# Altium PCB vp40_base_board.PcbDoc (part 4 of 5)
Units mil, origin at the board's own origin, x right, y up, seen from the top; angles counter-clockwise.
Board outline 8267.72 x 4330.71 mil, 4 copper layers (Top Layer, Internal Plane 1, Internal Plane 2, Bottom Layer), stack 30.635 mil thick; 531 components, 391 nets, 1969 pads, 1352 vias.
Unrouted connection lines stored in the file: 302.
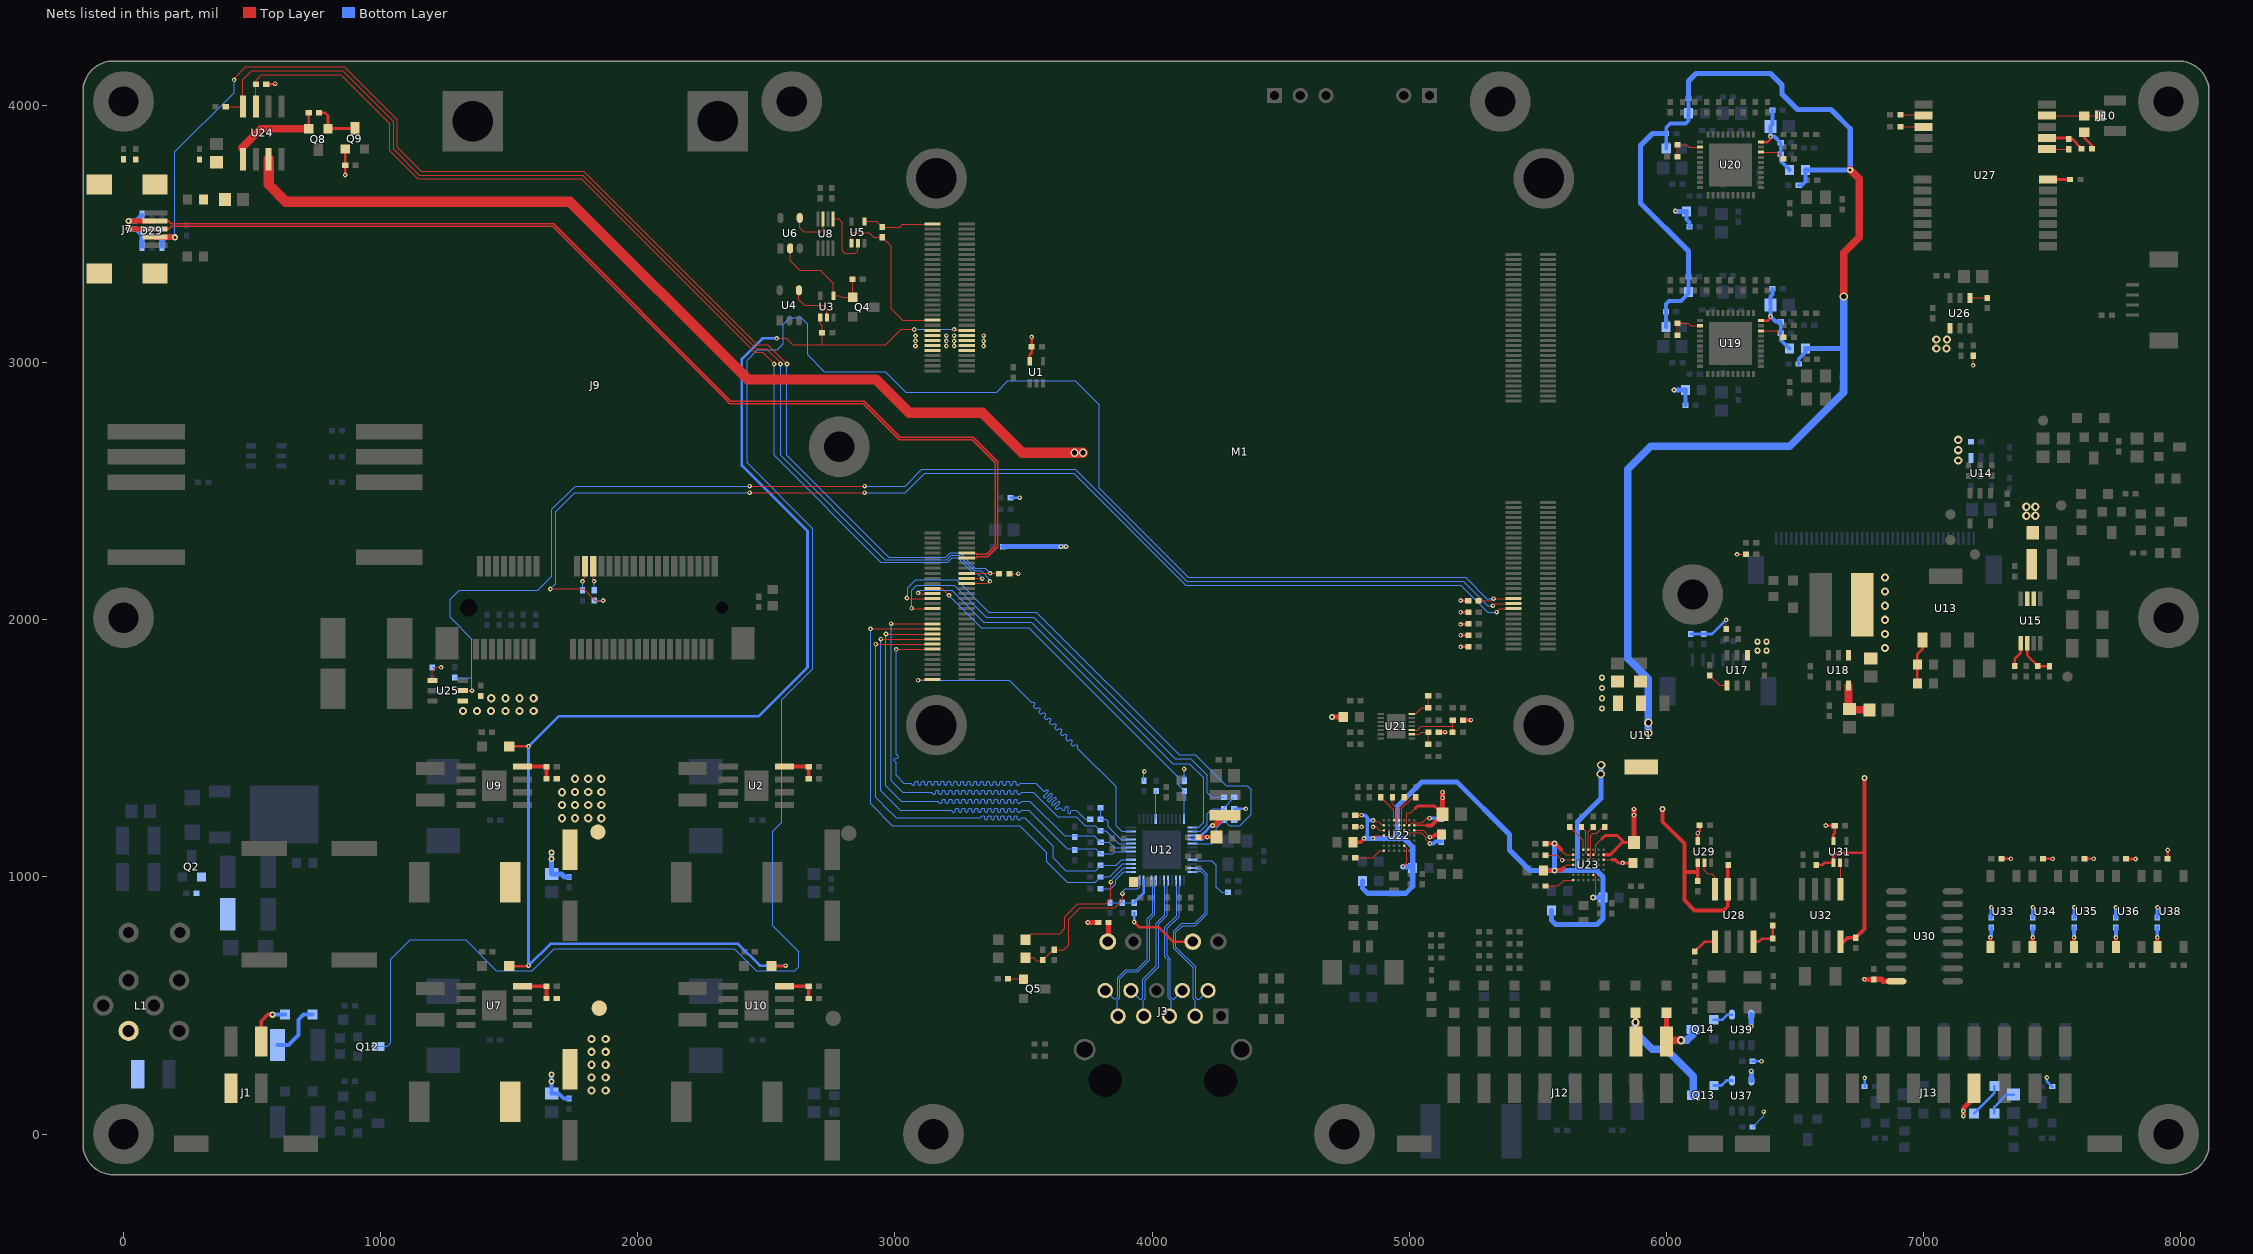
[diagram p6: the nets of this part, all layers, seen from the top]

## Via types
v1: diameter 18, hole 8, Top Layer to Bottom Layer, tented both sides, 481 vias
v2: diameter 18, hole 8, Top Layer to Bottom Layer, 376 vias
v3: diameter 32, hole 16, Top Layer to Bottom Layer, tented both sides, 202 vias
v4: diameter 24, hole 12, Top Layer to Bottom Layer, tented both sides, 182 vias
v5: diameter 24, hole 12, Top Layer to Bottom Layer, 65 vias
v6: diameter 32, hole 16, Top Layer to Bottom Layer, 34 vias
v7: diameter 32, hole 20, Top Layer to Bottom Layer, 7 vias
v8: diameter 32, hole 20, Top Layer to Bottom Layer, tented both sides, 3 vias
v9: diameter 35, hole 20, Top Layer to Bottom Layer, 2 vias

## Nets (pads, with @x,y where several pads share a name; then routed paths per layer and width w, separated by ;. In a path a pad name is that pad's centre, name@x,y a point inside that pad or via, vN(x,y) a via of type N, cw(c..) or ccw(c..) an arc to the next point about the centre after c; other vN are vias at no path point) (continued)
NetD37_1: D37.1 D39.2 J13.14 | length 264.6
  Top Layer w20: v2(7155,70) 7155,100 7196.85,141.85 J13.14@7196.85,178.35
  Bottom Layer w10: D39.2@7196.85,80.71 7275.59,159.45 D37.1@7275.59,187.01
  other v2: 7155,90
NetD37_2: D37.2 R157.2 | length 119.5
  Bottom Layer w10: D37.2@7275.59,80.71 7275.59,105.59 7323.54,153.54 R157.2@7350.39,153.54
NetD41_2: D41.2 R162.2 | length 219.9
  Bottom Layer w15: R162.2@598.43,346.46 641.46,346.46 680,385 680,445 699.57,464.57 D41.2@734.25,464.57
NetD44_2: D44.2 J12.13 Q13.1 | length 521.9
  Top Layer w20: D44.2@5880,471.85 5881.89,469.96 J12.13@5881.89,360.24
  Bottom Layer w30: v6(5880,435) 5880,395 5945,330 6000,330 6105.04,224.96 Q13.1@6105.04,150.98
NetD46_2: D46.2 J12.15 Q14.1 | length 245.5
  Top Layer w20: J12.15@6000,360.24 D46.2@6000,471.85
  Top Layer w30: J12.15@6000,360.24 6004.76,365 v6(6057.43,365)
  Bottom Layer w30: v6(6057.43,365) 6080,365 6104.16,389.16 Q14.1@6104.16,406.88
NetJ3_11: J3.11 R35.2 | length 75.4
  Top Layer w20: J3.11@3827.56,748.82 3830.9,752.16 R35.2@3830.9,822.83
NetJ3_13: J3.13 R33.2 | length 294.4
  Top Layer w10: v1(3930,825) 3950,805 4025,805 4081.18,748.82 J3.13@4157.87,748.82
  Bottom Layer w10: v1(3930,825) R33.2@3930,860
NetJ9_20: J9.20 R132.1 | length 87.1
  Top Layer w4.7: v2(1785,2150) 1785,2155.39 1795.28,2165.67 J9.20@1795.28,2208.66
  Bottom Layer w4.7: R132.1@1783.46,2126.43 1785,2127.96 v2(1785,2150)
NetJ9_22: J9.22 R133.1 | length 92.4
  Top Layer w4.7: J9.22@1826.77,2208.66 1826.77,2153.23 v2(1830,2150)
  Bottom Layer w4.7: v2(1830,2150) 1830,2153.58 1830.71,2154.29 R133.1@1830.71,2126.43
NetJ10_1: J10.1 L31.2 U27.11 | length 205.5
  Top Layer w4.7: U27.11@7480.43,3960.63 J10.1@7685.94,3960.63
NetL7_1: L7.1 U12.3 | length 158.6
  Top Layer w20: v1(4235,1200) 4243.31,1200 L7.1@4283.46,1240.16
  Bottom Layer w10: U12.3@4157.48,1161.42 4190.21,1161.42 4198.79,1170 4200,1170 4230,1200 v1(4235,1200)
NetL31_1: L31.1 R141.1 | length 77.4
  Top Layer w10: L31.1@7625,3896.27 7625,3875 7655.13,3844.87 R141.1@7655.13,3831.34
NetQ2_2: Q2.2 R1.1 R2.2
NetQ4_2: Q4.2 R15.1 U3.4 U6.2 | length 449.4
  Top Layer w4.7: U6.2@2592.52,3444.88 2592.52,3397.48 2630,3360 2710,3360 2760.65,3309.35 U3.4@2760.65,3260.39 2786.86,3260.39 2793.12,3254.13 Q4.2@2835.44,3254.13 2835,3254.57 R15.1@2835,3325
NetQ5_2: Q5.2 R43.2 | length 61.2
  Top Layer w4.7: R43.2@3439.87,605 3497.36,605 Q5.2@3500,602.36
NetQ8_1: Q8.1 Q9.1 R120.1 | length 196
  Top Layer w10: R120.1@760.28,3972.44 782.56,3972.44 795.28,3959.72 Q8.1@795.28,3909.45 796.54,3910.71 Q9.1@900.2,3910.71
NetQ13_2: Q13.2 U37.4 | length 79
  Bottom Layer w10: Q13.2@6185.04,188.98 6213.98,188.98 6233.66,208.66 U37.4@6255.91,208.66
NetQ14_2: Q14.2 U39.4 | length 79.5
  Bottom Layer w10: Q14.2@6184.16,444.88 6218.54,444.88 6238.23,464.57 U39.4@6255.46,464.57
NetR7_1: R7.1 R8.1 U2.4 | length 141.3
  Top Layer w15: U2.4@2570.87,1429.53 2664.33,1429.53 R7.1@2664.72,1429.13 R8.1@2664.72,1381.89
NetR12_1: R12.1 R13.1 U7.4 | length 141.3
  Top Layer w15: U7.4@1551.18,575.2 1644.65,575.2 R12.1@1645.04,574.8 R13.1@1645.04,527.56
NetR17_1: R17.1 R19.1 U9.4 | length 141.3
  Top Layer w15: U9.4@1551.18,1429.53 1644.65,1429.53 R17.1@1645.04,1429.13 R19.1@1645.04,1381.89
NetR18_1: R18.1 R20.1 U10.4 | length 141.3
  Top Layer w15: U10.4@2570.87,575.2 2664.33,575.2 R18.1@2664.72,574.8 R20.1@2664.72,527.56
NetR34_1: R34.1 U12.41 | length 108.9
  Bottom Layer w4.7: U12.41@4014.27,1225.89 4014.27,1332.73 R34.1@4015.75,1334.2
NetR38_1: R38.1 R40.2 U12.2 | length 243.8
  Bottom Layer w4.7: U12.2@4157.48,1177.17 4187.17,1177.17 4215,1205 4215,1245 4235,1265 R38.1@4279.87,1265 4279.87,1270 R40.2@4319.87,1310
NetR42_2: R42.2 U12.25 | length 154
  Bottom Layer w4.7: R42.2@3799.87,955 3840,955 3859.14,974.14 3859.14,989.14 3889.69,1019.69 U12.25@3918.3,1019.69
NetR45_2: R45.2 U12.9 | length 240
  Bottom Layer w4.7: U12.9@4157.48,1066.93 4160.76,1063.65 4231.35,1063.65 4250,1045 4250,960 4270,940 R45.2@4295.13,940
NetR61_2: R61.2 R65.1 U15.2 | length 151.6
  Top Layer w10: U15.2@7403.54,1909.45 7403.54,1861.58 R65.1@7445,1820.13 7489.75,1820.13 R61.2@7490,1819.87
NetR62_2: R62.2 R64.1 U13.1 | length 177.4
  Top Layer w10: R64.1@6976.38,1751.97 6976.38,1866.38 6996.06,1886.06 U13.1@6996.06,1921.26
NetR63_1: R63.1 U15.1 | length 98.8
  Top Layer w10: R63.1@7355,1820.13 7355,1848.98 7377.95,1871.93 U15.1@7377.95,1909.45
NetR70_2: R70.2 U17.1 | length 83
  Top Layer w4.7: R70.2@6169.29,1783.28 6207.57,1745 6235.13,1745 U17.1@6236.03,1744.09
NetR74_1: R74.1 R76.1 U18.6 | length 171.3
  Top Layer w30: U18.6@6708.66,1744.09 6708.66,1657.04 R76.1@6712.6,1653.1 6715.7,1650 R74.1@6790,1650
NetR79_1: R79.1 R80.1 U19.32 | length 139.9
  Top Layer w4.7: R80.1@6042.87,3106.3 R79.1@6042.87,3153.54 6085.16,3153.54 6095,3143.7 U19.32@6131.45,3143.7
NetR81_1: R81.1 U19.18 | length 98.7
  Top Layer w4.7: U19.18@6367.67,3124.02 6430.22,3124.02 R81.1@6455.81,3098.43
NetR88_1: R88.1 R89.1 U20.32 | length 139.9
  Top Layer w4.7: R89.1@6042.99,3800.91 R88.1@6042.99,3848.16 6079.84,3848.16 6089.69,3838.31 U20.32@6131.57,3838.31
NetR90_1: R90.1 U20.18 | length 98.7
  Top Layer w4.7: U20.18@6367.8,3818.63 6430.35,3818.63 R90.1@6455.94,3793.04
NetR95_2: R95.2 R101.1 U21.9 | length 115.6
  Top Layer w4.7: U21.9@5009.84,1555.12 5039.91,1555.12 5048.04,1563.24 5074.36,1563.24 R95.2@5074.61,1562.99 5074.61,1516 R101.1@5074.36,1515.75
NetR96_2: R96.2 R100.1 U21.10 | length 213.1
  Top Layer w4.7: U21.10@5009.84,1570.87 5030.87,1570.87 5046.62,1586.62 5169.1,1586.62 ; R100.1@5168.85,1562.99 5169.1,1563.24 5169.1,1586.62 ; R96.2@5169.1,1610.24 5169.1,1586.62
NetR97_1: R97.1 R99.1 U21.14 | length 121.5
  Top Layer w4.7: U21.14@5009.84,1633.86 5026.1,1633.86 5049.72,1657.48 R97.1@5074.36,1657.48 R99.1@5074.36,1704.72
NetR104_1: R104.1 U22.C3 | length 174
  Top Layer w3: U22.C3@4980.32,1181.11 4990.08,1171.35 5045,1171.35
  Top Layer w4.7: 5045,1171.35 5047.3,1171.35 5063.65,1155 5063.65,1146.35 v1(5080,1130)
  Bottom Layer w15: v1(5080,1130) 5095,1130 5102.35,1137.35 R104.1@5125,1137.35
NetR105_1: R105.1 U22.B2 | length 137.8
  Top Layer w3: U22.B2@5000,1200.79 5000.17,1200.79 5009.84,1210.46 5045,1210.46
  Top Layer w4.7: 5045,1210.46 5050.46,1210.46 5068.35,1228.35 v1(5078.74,1228.35)
  Bottom Layer w15: v1(5078.74,1228.35) 5101.53,1228.35 5105,1224.87 R105.1@5125,1224.87
NetR106_1: R106.1 U22.E1 | length 110.5
  Top Layer w4.7: R106.1@4890,1309.87 4940.74,1259.13 4940.74,1230.4 4940.94,1230.2 U22.E1@4940.94,1220.48
NetR107_1: R107.1 U22.D3 | length 161.8
  Top Layer w3: U22.D3@4960.63,1181.11 4961.11,1181.11 4970.13,1190.13 4970.13,1240
  Top Layer w4.7: 4970.13,1240 4970.13,1264.91 4970,1265.04 5014.83,1309.87 R107.1@5025,1309.87
NetR108_1: R108.1 U22.D1 | length 98
  Top Layer w4.7: U22.D1@4960.63,1220.48 4960.3,1220.81 4960.3,1269.06 4980.32,1289.09 4980.32,1309.55 R108.1@4980,1309.87
NetR109_1: R109.1 U22.D2 | length 119.7
  Top Layer w3: 4950.44,1240 4950.44,1210.98 U22.D2@4960.63,1200.79
  Top Layer w4.7: R109.1@4935,1309.87 4935,1285 4950.44,1269.56 4950.44,1240
NetR110_1: R110.1 U22.G7 | length 122.8
  Top Layer w4.7: R110.1@4790.13,1075 4858.2,1075 4885.55,1102.36 U22.G7@4901.57,1102.36
NetR115_1: R115.1 U23.E1 | length 110.3
  Top Layer w4.7: R115.1@5625,1194.87 5677.36,1142.52 5677.36,1106.5 U23.E1@5677.16,1106.3
NetR116_1: R116.1 U23.D3 | length 165
  Top Layer w3: U23.D3@5696.85,1066.93 5706.35,1076.43 5706.35,1125
  Top Layer w4.7: 5706.35,1125 5706.35,1159.81 5716.54,1170 5730,1170 5754.87,1194.87 R116.1@5760,1194.87
NetR117_1: R117.1 U23.D1 | length 96.1
  Top Layer w4.7: U23.D1@5696.85,1106.3 5696.85,1176.72 R117.1@5715,1194.87
NetR118_1: R118.1 U23.D2 | length 119.4
  Top Layer w3: 5687.35,1125 5687.35,1096.11 U23.D2@5696.85,1086.61
  Top Layer w4.7: R118.1@5670,1194.87 5687.35,1177.53 5687.35,1125
NetR119_1: R119.1 U23.G7 | length 117.3
  Top Layer w4.7: R119.1@5530.13,965 5580,965 5603.18,988.18 U23.G7@5637.79,988.18
NetR127_2: R127.2 U25.1 | length 111.3
  Top Layer w4.7: U25.1@1201.03,1763.78 1201.03,1801.03 1215,1815 v2(1235,1815)
  Bottom Layer w4.7: R127.2@1200.79,1815.15 1234.85,1815.15 v2(1235,1815)
NetR135_2: R135.2 U26.1 | length 67
  Top Layer w4.7: U26.1@7181.22,3251.97 7247.96,3251.97 R135.2@7248.15,3252.16
NetR137_1: R137.1 U27.14 | length 91.7
  Top Layer w4.7: R137.1@6910.01,3964.57 6996.18,3964.57 U27.14@7000.12,3960.63
NetR138_1: R138.1 U27.15 | length 90.1
  Top Layer w4.7: R138.1@6910.01,3917.32 U27.15@7000.12,3917.32
NetR139_1: R139.1 R141.2 U27.9 | length 153.7
  Top Layer w10: U27.9@7480.43,3874.02 7561.06,3874.02 7565,3870.08 7578.69,3870.08 7615.13,3833.65 R141.2@7615.13,3831.34
NetR139_2: R139.2 U27.8 | length 90.6
  Top Layer w4.7: U27.8@7480.43,3830.71 7570.17,3830.71 R139.2@7570.8,3830.08
NetR140_2: R140.2 U27.7 | length 86.4
  Top Layer w10: U27.7@7484.37,3712.6 R140.2@7570.8,3712.6
NetR143_2: R143.2 U28.5 | length 94.6
  Top Layer w10: R143.2@6110,709.87 6148.16,748.03 U28.5@6188.78,748.03
NetR145_2: R145.2 R146.1 U28.8 | length 130.2
  Top Layer w10: U28.8@6338.78,748.03 6359.25,748.03 6371.5,760.28 R146.1@6413.39,760.28 R145.2@6413.39,810.83
NetR151_2: R151.2 U33.1 | length 77.2
  Top Layer w15: v2(7260,765) 7260,729.37 U33.1@7261.02,728.35
  Bottom Layer w15: v2(7260,765) 7261.02,765 7263.78,767.76 R151.2@7263.78,802.96
NetR156_2: R156.2 U34.1 | length 75.3
  Top Layer w15: U34.1@7423.43,728.35 7423.43,763.23 v2(7425.2,765)
  Bottom Layer w15: v2(7425.2,765) R156.2@7425.2,802.96
NetR160_2: R160.2 U35.1 | length 74.9
  Top Layer w15: U35.1@7585.83,728.35 v2(7585.83,765)
  Bottom Layer w15: v2(7585.83,765) 7585.83,802.17 R160.2@7586.61,802.96
NetR165_2: R165.2 U36.1 | length 74.9
  Top Layer w15: v2(7747.84,765) 7748.23,764.61 U36.1@7748.23,728.35
  Bottom Layer w15: v2(7747.84,765) 7748.03,765.19 R165.2@7748.03,802.96
NetR168_2: R168.2 U38.1 | length 75.3
  Top Layer w15: v2(7909.26,765) 7910.63,763.63 U38.1@7910.63,728.35
  Bottom Layer w15: v2(7909.26,765) 7909.26,802.77 R168.2@7909.45,802.96
NetU3_2: U3.2 U4.4 | length 194.9
  Top Layer w4.7: U4.4@2626.78,3281.69 2626.78,3244.53 2648.67,3222.64 2723.31,3222.64 2735.05,3210.9 U3.2@2735.05,3175.39
NetU5_2: U5.2 U8.5 | length 249.4
  Top Layer w4.7: U8.5@2759.84,3559.06 2780.94,3559.06 2795,3545 2795,3435 2805,3425 2845,3425 2856.31,3436.31 U5.2@2856.31,3464.57
NetU6_4: U6.4 U8.7 | length 178.1
  Top Layer w4.7: U6.4@2629.92,3562.99 2629.92,3525.08 2645,3510 2710.79,3510 2720.47,3519.69 U8.7@2720.47,3559.06
NetU28_4: U28.4 U29.2 | length 127.8
  Top Layer w4.7: U29.2@6147.65,1055.12 6147.65,1026.07 6161.47,1012.25 6175.84,1012.25 6188.78,999.31 U28.4@6188.78,952.76
NetU31_2: U31.2 U32.1 | length 103.3
  Top Layer w4.7: U31.2@6675.2,1055.12 6677.36,1052.96 U32.1@6677.36,952.76
OTG-ID: D29.1 J7.4 M1.C43 R122.2 | length 5052.3
  Top Layer w4.7: v2(430,4100) 430,4105 475.97,4150.97 859.03,4150.97 1065,3945 1065,3837.09 1157.09,3745 1790.24,3745 2465.24,3070 2505,3070 v2(2580,2995) ; M1.C43@3279.53,2181.1 v2(3370,2181.1) 3404.02,2181.1 R122.2@3405.13,2180
  Top Layer w20: J7.4@122.05,3488.19 199.56,3488.19 v5(200,3487.75)
  Bottom Layer w4.7: v5(200,3487.75) 200,3820 430,4050 v2(430,4100) ; v2(2580,2995) 2580,2640 2976.35,2243.65 3198.09,2243.65 3215.19,2260.75 3252.52,2260.75 3313.27,2200 3351.1,2200 v2(3370,2181.1)
  Bottom Layer w20: D29.1@150,3455 150,3475 162.75,3487.75 v5(200,3487.75)
OTG-OC: M1.C41 R124.1 U24.3 | length 4093.2
  Top Layer w4.7: U24.3@514.37,3996.25 514.37,4081.74 R124.1@515.31,4082.68 515.31,4099.21 536.09,4120 845,4120 1035,3930 1035,3825 1145,3715 1780,3715 2455,3040 2485,3040 v2(2530,2995) ; M1.C41@3279.53,2161.42 3338.58,2161.42 v2(3340,2160)
  Bottom Layer w4.7: v2(2530,2995) 2530,2640 2945.75,2224.25 3206.13,2224.25 3223.23,2241.35 3244.49,2241.35 3305.24,2180.6 3319.4,2180.6 v2(3340,2160)
OTG-PWREN: M1.C39 R125.2 U24.4 | length 4297.4
  Top Layer w4.7: R125.2@397.83,3996.06 464.18,3996.06 U24.4@464.37,3996.25 464.37,4101.19 498.18,4135 852.64,4135 1050,3937.64 1050,3830 1150,3730 1785,3730 2460,3055 2500,3055 2555,3000 v2(2555,2995) ; M1.C39@3279.53,2141.73 3361.08,2141.73 v2(3369.35,2150)
  Bottom Layer w4.7: v2(2555,2995) 2555,2640 2961.05,2233.95 3202.11,2233.95 3219.21,2251.05 3248.5,2251.05 3309.25,2190.3 3334.7,2190.3 3369.35,2155.65 v2(3369.35,2150)
OTG-SH-GND: C172.2 J7.6 J7.7 J7.8 J7.9 R123.1
OTG_N: D29.4 J7.2 M1.C49 | length 4297.8
  Top Layer w5.3: J7.2@122.05,3551.18 173.91,3551.18 185.16,3539.93 1672.28,3539.93 2362.22,2850 2880,2850 3020,2710 3305,2710 3400,2615 3400,2283.88 3364.76,2248.64 3361.62,2245.5 3319.02,2245.5 3313.67,2240.16 M1.C49@3279.53,2240.16
  Top Layer w20: v5(20,3551.18) J7.2@122.05,3551.18
  Bottom Layer w20: v5(20,3551.18) 49.33,3551.18 D29.4@71.26,3573.11
OTG_P: D29.3 J7.3 M1.C51 | length 4311.6
  Top Layer w5.3: J7.3@122.05,3519.69 173.91,3519.69 185.16,3530.93 1668.56,3530.93 2334.49,2865 2358.49,2841 2876.27,2841 3016.27,2701 3301.27,2701 3391,2611.27 3391,2287.61 3357.89,2254.5 3319.02,2254.5 3313.67,2259.84 M1.C51@3279.53,2259.84
  Top Layer w20: v5(20,3520) 20.31,3519.69 J7.3@122.05,3519.69
  Bottom Layer w20: v5(20,3520) 50,3520 71.26,3498.74 D29.3@71.26,3455
OTGVBUS: C170.2 C173.1 C174.1 L29.1 Q8.2 R120.2 U24.5 | length 354.1
  Top Layer w10: Q8.2@720.28,3909.45 R120.2@720.28,3972.44
  Top Layer w30: 460,3835 534.45,3909.45 Q8.2@720.28,3909.45
P1V8: C30.1 C77.1 C84.1 C85.1 C114.1 C115.1 C116.1 C145.2 C147.2 C148.2 C162.2 C164.2 C165.2 L11.1 L12.1 L13.1 L15.1 L16.1 L17.1 L21.1 L27.1 U11.2 U11.4 U22.C6 U22.G2 U22.G4 U23.C6 U23.G2 U23.G4 | length 9157
  Top Layer w3: U22.C6@4980.32,1122.05 4990.08,1112.29 4990.08,1085 ; U23.C6@5716.54,1007.87 5726.04,998.37 5726.04,970
  Top Layer w4.7: v1(4860,1150) 4860,1157.48 4863.74,1161.22 4901.57,1161.22 U22.G4@4901.57,1161.42 ; v1(4860,1220) 4865,1215 4880.79,1215 4895,1200.79 U22.G2@4901.57,1200.79 ; v1(4975,1040) 4991.35,1056.35 4991.35,1071.77 4990.08,1073.04 4990.08,1085 ; 5590,1106.3 5609.69,1086.61 U23.G2@5637.79,1086.61 ; 5600,1035 5612.24,1047.24 U23.G4@5637.79,1047.24 ; v4(5715,920) 5726.35,931.35 5726.35,956.77 5726.04,957.09 5726.04,970
  Top Layer w15: C148.2@4781.5,1135 4810,1135 v1(4825,1150) ; C145.2@4789.87,1240 4814.84,1240 4815,1240.16 v1(4815,1240) ; C165.2@5521.5,1025 v4(5565,1025) 5590,1025 5600,1035 ; C162.2@5529.87,1130 v4@5565,1130 ; v4(5565,1129.92) 5566.38,1129.92 5590,1106.3
  Top Layer w30: v7(6690,3257.57) 6690,3427.4 6750,3487.4 6750,3715 v5(6715,3750)
  Bottom Layer w10: C147.2@5008.5,1040 C147.2@5013.5,1035
  Bottom Layer w15: v1(4815,1240) 4828.5,1240 4837,1231.5 4837,1220 ; v1(4825,1150) 4837,1162 4837,1220 ; v1(4860,1220) 4837,1220 ; L11.1@5998.87,3139.26 5998.43,3139.7 C77.1@5998.43,3198.31 5998.43,3228.43 6010,3240 6056.86,3240 6086.17,3269.31 L13.1@6086.17,3275.59 6085.73,3276.03 C85.1@6085.73,3334.65 ; L15.1@5999.69,3832.41 5999.69,3914.69 6015,3930 6074.98,3930 6085.86,3940.87 C115.1@6085.86,4029.26 ; C84.1@6515.13,2995 6515.13,3014.54 6541.5,3040.91 L12.1@6541.5,3055 ; C114.1@6515.13,3690 6526.92,3690 6541.5,3704.57 L16.1@6541.5,3750
  Bottom Layer w20: L21.1@4818.5,985 4818.5,956.52 4838,937.02 4986.52,937.02 5013.5,964 C147.2@5013.5,1035 5013.5,1116.5 4980,1150 4955,1150 ; v1(4825,1150) v1(4860,1150) 4955,1150 ; v1(4975,1040) C147.2@5008.5,1040 ; L27.1@5553.5,870 5553.5,831.5 5570,815 5730,815 5753.5,838.5 C164.2@5753.5,920 ; v4(5565,1129.92) v4(5565,1025) ; v4(5715,920) C164.2@5753.5,920 ; v7(5746.4,1435) 5746.4,1306.45 5655,1215.05 5655,1025 ; C116.1@5999.24,3891.46 5946.46,3891.46 5900,3845 5900,3620 6085.73,3434.27 C85.1@6085.73,3334.65 ; C115.1@6085.86,4029.26 6085.86,4095.86 6115,4125 6405.13,4125 6450,4080.13 6450,4045 6510,3985 6640,3985 6715,3910 v5(6715,3750) L16.1@6541.5,3750 ; L12.1@6541.5,3055 6690,3055 ; 4955,1150 4955,1275 5050,1370 5185,1370 5390,1165 5390,1105.12 5470.12,1025 v4(5565,1025) ; v4(5565,1025) 5655,1025 ; 5655,1025 5728.5,1025 5753.5,1000 C164.2@5753.5,920
  Bottom Layer w30: v7(5930,1560) v7(5930,1600) 5930,1770 5850,1850 5850,2585 5940,2675 6480,2675 6690,2885 6690,3055 v7(6690,3257.57)
  other v7: 5745,1400
P2V8-OUT: D8.1 D11.1 D12.1 M1.D17 R11.1 U3.1 | length 5703.7
  Top Layer w4.7: v2(2540,3095) 2577.52,3095 2602.52,3070 2718.78,3070 ; U3.1@2709.46,3175.39 2709.46,3151.3 2716.89,3143.87 R11.1@2716.89,3116.34 2716.89,3071.89 2718.78,3070 ; v1(3075,3129.32) 3024.32,3129.32 2965,3070 2718.78,3070 ; v1(3230,3130) 3230,3125.99 M1.D17@3279.53,3125.99
  Top Layer w10: D8.1@1500,653.54 1573.35,653.54 v2(1574.8,655) ; D11.1@1500,1507.87 v2(1574.8,1507.87) ; D12.1@2519.69,653.54 2573.54,653.54 v2(2575,655)
  Bottom Layer w4.7: v1(3075,3129.32) 3075.68,3130 v1(3230,3130)
  Bottom Layer w10: v2(1574.8,655) v2@1574.9,655.1 ; v2(2540,3095) 2485,3095 2405,3015 2405,2600 2660,2345 2660,1815 2470,1625 1691.93,1625 v2(1574.8,1507.87) 1574.8,655.2 v2@1574.9,655.1 ; v2(2575,655) 2475,655 2390,740 1659.8,740 v2@1574.9,655.1
P3V3: C24.2 C27.1 C28.2 C31.1 C40.1 C41.1 C63.1 C64.1 C75.1 C105.1 C141.2 C144.2 C156.2 C159.2 C191.1 C194.1 C200.1 L4.2 L6.1 L9.1 L14.1 L18.1 L19.1 M1.D9 M1.D10 M1.D11 M1.D12 M1.D13 M1.D14 M1.D15 M1.D16 pad.@1845,1175 Q9.2 R5.1 R19.2 R23.2 R24.2 R25.2 R26.2 R27.2 R28.2 R29.2 R35.1 R36.2 R37.2 R38.2 R39.2 R69.1 R72.1 R95.1 R96.1 R121.2 R122.1 R124.2 R126.1 R134.1 R149.1 R150.1 R151.1 R154.1 R155.1 R156.1 R159.1 R160.1 R161.1 R164.1 R165.1 R166.1 R167.1 R168.1 R169.1 U1.5 U11.3 U12.4 U14.1 U15.6 U15.7 U17.4 U22.A3 U22.G3 U23.A3 U23.G3 U25.4 U26.4 U29.5 U30.16 U31.5 U37.5 U39.5 | length 2900.3
  Top Layer w3.82: v1(6275,2255) R72.1@6309.87,2255
  Top Layer w4.7: R122.1@3445.13,2180 v1(3480,2180) ; C141.2@4789.87,1195 v1(4815,1195) ; v1(4860,1195) 4871.83,1195 4885.73,1181.11 U22.G3@4901.57,1181.11 ; U22.A3@5019.69,1181.11 5053.89,1181.11 v1(5080,1155) ; C156.2@5529.87,1085 5575,1085 5593.07,1066.93 U23.G3@5637.79,1066.93 ; U23.A3@5755.91,1066.93 5788.19,1066.93 ; R69.1@6232.28,1965.01 v2(6232.28,2000) ; v1(7193.03,2990) R134.1@7193.03,3027.12
  Top Layer w10: R124.2@555.31,4082.68 587.68,4082.68 v2(590,4085) ; v2(862.02,3730) 862.2,3730.19 Q9.2@862.2,3830.71 ; U1.5@3524.25,3005.43 3524.25,3031.57 3531.68,3039 R5.1@3531.68,3062.16 v2(3531.68,3100.63) ; C40.1@4238.7,1155 C40.1@4248.03,1145.67 ; v2(5200,1895) R23.2@5224.49,1895 ; v2(5200,1940) 5226.73,1940 R24.2@5231.65,1935.08 ; v2(5200,1982.32) R25.2@5231.65,1982.32 ; v2(5200,2029.57) R26.2@5231.65,2029.57 ; v2(5200,2075) R161.1@5229.87,2075 ; U29.5@6122.05,1140.12 v2(6122.05,1170) 6129.48,1177.43 C191.1@6129.48,1200.79 ; v2(6620,1200) C200.1@6654.87,1200 6654.87,1169.87 6649.61,1164.61 U31.5@6649.61,1140.12 ; R150.1@7303.59,1070.86 v2(7340,1070.87) ; R155.1@7465.01,1070.87 v2(7502.05,1070.87) ; R159.1@7626.43,1070.87 v2(7662,1070.87) ; R164.1@7787.84,1070.87 7788.71,1070 v2(7825,1070) ; R167.1@7949.26,1070.87 7950,1071.61 v2(7950,1105)
  Top Layer w12: 5788.19,1066.93 5801.35,1066.93 5813.17,1055.12 C159.2@5870.08,1055.12
  Top Layer w15: C41.1@4180.13,1155 C40.1@4238.7,1155 ; v1(5080,1155) 5091.69,1155 5102.05,1165.36 C144.2@5125.99,1165.36 ; R95.1@5114.61,1562.99 v1(5139.76,1562.99) ; R96.1@5209.1,1610.24 5209.34,1610 v1(5240,1610)
  Top Layer w20: v1(3750,822.83) R35.1@3790.9,822.83 ; v4(4700,1622.05) L19.1@4743.65,1622.05 ; v2(6770,601.92) C194.1@6807.09,601.92 6807.53,602.36 6835.62,602.36 6843.5,594.49 U30.16@6894.17,594.49
  Bottom Layer w4.7: R36.2@3968.5,1374.2 3968.5,1408.5 v1(3970,1410) ; v1(4125,1420) 4125.98,1419.02 R39.2@4125.98,1374.2 ; R166.1@6335.09,27.56 6378.13,70.6 v2(6378.13,87.13)
  Bottom Layer w10: R29.2@3449.87,2475 v2(3485,2475) ; U12.4@4157.48,1145.67 4195.67,1145.67 4205,1155 v1(4215,1155) ; R37.2@4319.87,1220 R38.2@4319.87,1265 v1(4365,1265) ; R28.2@6095,1944.87 R27.2@6145,1944.87 6177.16,1944.87 v2(6232.28,2000) ; R169.1@6335.09,283.46 v2(6370,283.46) ; R149.1@6771.21,185.04 v2(6771.21,218.79) ; v2(7480,220) 7480,205.48 R154.1@7500.44,185.04
  Bottom Layer w15: C75.1@6073.92,2834.65 6073.92,2893.26 L14.1@6074.36,2893.7 ; L18.1@6078.19,3588.2 6078.19,3556.81 6089.56,3545.44 C105.1@6089.56,3528.2 ; R151.1@7263.78,842.96 v2(7263.78,881.89) ; R156.1@7425.2,842.96 v2(7425.2,881.89) ; R160.1@7586.61,842.96 v2(7586.61,881.89) ; R165.1@7748.03,842.96 v2(7748.03,881.89) ; R168.1@7909.45,842.96 7909.45,881.34 v2(7910,881.89)
  Bottom Layer w20: v4(1665,1095) 1665,1012.17 C24.2@1665.35,1011.81 1703.19,1011.81 1714.81,1000.19 C28.2@1732.28,1000.19 ; v1(6030,2893.7) L14.1@6074.36,2893.7 ; v1(6035,3590) 6036.8,3588.2 L18.1@6078.19,3588.2 ; v2(6330.27,245) 6330.71,244.56 U37.5@6330.71,208.66 ; U39.5@6330.27,464.57 6330.27,420.44 v2(6330.71,420)
  other v1: 5830,1055.12 5595,1065 3080,3065 3200,3065 3230,3064.96 3345,3065 3080,3085 3200,3085 3230,3084.65 3345,3084.65 3080,3104.33 3200,3105 3230,3105 3345,3105
  other v3: 1704.72,1228.35 1755.91,1228.35 1807.09,1228.35 1858.27,1228.35 1704.72,1279.53 1755.91,1279.53 1807.09,1279.53 1858.27,1279.53 1704.72,1329.53 1755.91,1330.71 1807.09,1330.71 1858.27,1330.71 1755.91,1381.89 1807.09,1381.89 1858.27,1381.89 7400,2405 7435,2405 7400,2440 7435,2440 7135,2620 7135,2660 7135,2700 7050,3055 7090,3055 7050,3090 7091.11,3090
  other v4: 1665,1070 5750,1655 5750,1695 5750,1735 5750,1775
  other v5: 6355,1880 6390,1880 6355,1915 6390,1915
  other v6: 1320,1645 1375,1645 1428.94,1645 1485,1645 1540,1645 1595,1645 1430,1695 1485,1695 1540,1695 1595,1695
P5V0: C17.1 C18.2 C19.2 C71.1 C140.2 C155.2 C189.1 C190.1 C199.1 C201.2 L3.2 L10.1 pad.@1850,490 R13.2 R31.2 U18.1 U22.A2 U22.C2 U23.A2 U23.C2 U24.7 U28.3 U29.1 U31.1 U32.8 | length 6754.4
  Top Layer w3: U22.C2@4980.32,1200.79 4990,1210.46 4990,1240 ; U23.C2@5716.54,1086.61 U23.C2@5716.54,1086.61 5726.04,1096.04 5726.04,1125
  Top Layer w4.7: 4990,1240 4990,1245 4995,1250 5006.36,1250 5023.98,1267.62 ; 5726.04,1125 5749.35,1148.31
  Top Layer w5: U22.A2@5019.69,1200.79 5070,1200.79
  Top Layer w10: C199.1@6582.68,1046.8 6606.69,1046.8 6615,1055.12 U31.1@6649.61,1055.12 6649.61,1079.61 6665,1095 6770,1095
  Top Layer w12: 5023.98,1267.62 5032.29,1275.92 5098.11,1275.92 C140.2@5129.93,1244.1 ; 5749.35,1148.31 5762.45,1161.42 5808.58,1161.42 5836.14,1133.86 ; U23.A2@5755.91,1086.61 5781.58,1086.61 5828.83,1133.86 5836.14,1133.86 ; C155.2@5874.02,1133.86 5836.14,1133.86
  Top Layer w15: 5070,1200.79 5086.62,1200.79 C140.2@5129.93,1244.1 ; v5(5985,1263.78) 5985,1215 6070,1130 6070,1020 ; C190.1@6122.05,984.69 6122.05,1019.91 ; U29.1@6122.05,1055.12 6122.05,1019.91 ; C189.1@6240.16,1046.8 6238.78,1045.43 U28.3@6238.78,952.76 6238.78,886.24 6222.54,870 6110,870 6070,910 6070,1020 ; U32.8@6677.36,748.03 6689.8,748.03 6705.74,763.97 C201.2@6736.46,763.97 6770,797.51 6770,905 6770,1095 v5(6770,1385) ; 6070,1020 6070.09,1019.91 6122.05,1019.91
  Top Layer w20: C140.2@5129.93,1244.1 v2(5129.93,1329.53) ; C155.2@5874.02,1133.86 v2(5874.02,1263.78)
  Top Layer w40: U24.7@564.37,3791.53 564.37,3692.91 631.3,3625.98 1736.13,3625.98 2427.24,2934.88 2925.12,2934.88 3055,2805 3340,2805 3495,2650 v7(3697.96,2650) v7(3731.49,2650)
  Bottom Layer w15: v4(1665,232.28) 1665,157.83 C18.2@1665.35,157.48 1692.52,157.48 1712.02,137.98 C19.2@1732.28,137.98
  Bottom Layer w20: R31.2@3419.87,2285 v1(3665.28,2285)
  other v1: 3645,2285
  other v2: 5874.02,1240 5129.93,1308.23
  other v3: 1820,170 1875,170 1820,220 1875,220 1820,270 1875,270 1820,320 1875,320 1820,370 1875,370 6850,1890 6850,1945 6850,2000 6850,2055 6850,2110 6850,2165
  other v4: 1665,205
PCIE-PWR-EN: M1.A20 R128.2 U25.5 | length 5213.8
  Top Layer w4.7: U25.5@1319.14,1724.41 v2(1355,1724.41) ; v2(2435,2520) v2(2881.9,2520) ; v2(5325,2055) 5332.99,2062.99 M1.A20@5405.51,2062.99
  Bottom Layer w4.7: R128.2@1287.4,1775.4 1354.6,1775.4 1355,1775 ; v2(1355,1724.41) 1355,1775 ; v2(2435,2520) 1755.87,2520 1665.35,2429.49 1665.35,2170.35 1610,2115 1305,2115 1270,2080 1270,2010 1355,1925 1355,1775 ; v2(2881.9,2520) 3040,2520 3105,2585 3700.3,2585 4135.3,2150 5210,2150 5305,2055 v2(5325,2055)
PCIE-RST: M1.A18 R133.2 | length 4584.1
  Top Layer w4.7: v2(1660,2120) 1790,2120 1835,2075 v2(1865,2075) ; v2(2435,2495) v2(2881.9,2495) ; v2(5340,2030) 5340,2030.43 5352.87,2043.31 M1.A18@5405.51,2043.31
  Bottom Layer w4.7: v2(1660,2120) 1680,2140 1680,2420 1755,2495 v2(2435,2495) ; R133.2@1830,2075.13 1864.87,2075.13 v2(1865,2075) ; v2(2881.9,2495) 3040,2495 3115,2570 3695,2570 4130,2135 5200,2135 5305,2030 v2(5340,2030)
PHY-RX-CLK: R32.2 R54.2 U12.33 | length 208
  Bottom Layer w4.7: R54.2@3799.87,1270 R32.2@3799.87,1225 3820,1225 3830,1215 3830,1195 3879.33,1145.67 U12.33@3918.3,1145.67
PMIC-ON-REQ: M1.D22 R10.1 U5.1 | length 634.1
  Top Layer w4.7: U5.1@2830.71,3464.57 2830,3465.28 2830,3496.42 2838.58,3505 2901.06,3505 2918.31,3487.75 R10.1@2950.08,3487.75 2985,3452.83 2985,3210.36 3030,3165.36 M1.D22@3145.67,3165.36
PMIC-PWRON: M1.D60 R10.2 U5.4 | length 277.6
  Top Layer w4.7: U5.4@2881.9,3549.57 2928.26,3549.57 R10.2@2950.08,3527.75 3017.75,3527.75 3029.37,3539.37 M1.D60@3145.67,3539.37
POR-B: M1.D18
PVDD-1V8-VIDEO1: C80.1 C81.1 C95.2 C97.2 L12.2 U19.20 | length 326
  Top Layer w10: U19.20@6367.67,3163.39 6395.35,3163.39 6405,3173.04 v1(6405,3180)
  Bottom Layer w15: C80.1@6412.5,3287.4 6412.5,3265 6405.07,3257.57 C81.1@6405.07,3224.41 6405.07,3180.07 v1(6405,3180) 6425,3160 C97.2@6445.13,3160 C95.2@6445.13,3115 6445.13,3088.38 L12.2@6478.5,3055
PVDD-1V8-VIDEO2: C110.1 C111.1 C125.2 C127.2 L16.2 U20.20 | length 326.7
  Top Layer w10: U20.20@6367.8,3858 6393,3858 6405,3870 v1(6405,3880)
  Bottom Layer w15: C110.1@6412.63,3982.02 6412.63,3926.46 C111.1@6405.2,3919.02 6405.2,3880.2 v1(6405,3880) 6420.13,3880 C127.2@6445.13,3855 C125.2@6445.13,3810 6445.13,3784.87 6478.5,3751.5 L16.2@6478.5,3750
PWRIN: C1.1 J1.2 L1.1
REV-SIG: D41.1 J1.3 | length 181.9
  Top Layer w15: J1.3@535.43,360.24 535.43,439.09 560.91,464.57 v4(579.57,464.57)
  Bottom Layer w15: v4(579.57,464.57) D41.1@627.95,464.57
REV-STATUS: M1.A22 Q12.1 R161.2 | length 8600.6
  Top Layer w4.7: R161.2@5269.87,2075 5320,2075 v2(5327.68,2082.68) M1.A22@5405.51,2082.68
  Bottom Layer w4.7: Q12.1@989.45,341.15 1026.58,341.15 1040,354.57 1040,680 1115,755 1330,755 1449.8,635.2 1590.2,635.2 1675,720 2375,720 2460,635 2610,635 2625,650 2625,710 2523.86,811.14 2523.86,1177.2 2560,1213.35 2560,1690 2680,1810 2680,2355 2425,2610 2425,3010 2425.13,3010 2465.13,3050 2542.01,3050 2565,3072.99 2565,3150 2590,3175 2635,3175 2660,3150 2660,3030 2725,2965 2961.41,2965 3041.41,2885 3395,2885 3439.13,2929.13 3700.87,2929.13 3793.86,2836.14 3793.86,2511.14 4140,2165 5220,2165 5302.32,2082.68 v2(5327.68,2082.68)
RGMII-INT: M1.C34 R37.1 U12.5 | length 2239.1
  Top Layer w4.7: v1(3046.36,2085) 3048.69,2082.68 M1.C34@3145.67,2082.68
  Bottom Layer w4.7: v1(3046.36,2085) 3050,2085 3050,2125 3080,2155 3240,2155 3365,2030 3550,2030 4105,1475 4167.72,1475 4287.72,1355 4369.33,1355 4385,1339.33 4385,1244.41 4340.59,1200 4299.87,1200 R37.1@4279.87,1220 4250,1190.13 4250,1150 4229.92,1129.92 U12.5@4157.48,1129.92
RGMII-LED-10-100: D13.1 U12.26 | length 593.6
  Top Layer w4.7: D13.1@3507.87,755.91 3531.97,780 3640,780 3660,800 3660,845 3710,895 3820,895 3840,915 v1(3840,980)
  Bottom Layer w4.7: v1(3840,980) 3840,985 3890.43,1035.43 U12.26@3918.3,1035.43
RGMII-LED-1000: D14.1 R48.1 R56.2 U12.24 | length 671.1
  Top Layer w4.7: D14.1@3507.87,686.09 3538.91,686.09 3550,675 3572.83,675 R56.2@3574.8,676.98 3614.8,716.98 R48.1@3620,716.98 3656.98,716.98 3675,735 3675,835 3720,880 3855,880 3885,910 v1(3885,935)
  Bottom Layer w4.7: v1(3885,935) 3885,945 3895,955 3945,955 3951.28,961.28 U12.24@3951.28,986.71
RGMII-LED-ACT: R33.1 R49.1 R57.2 U12.23 | length 196
  Bottom Layer w4.7: R49.1@3836.3,900 3836.55,899.75 R57.2@3883.54,899.75 3929.75,899.75 R33.1@3930,900
  Bottom Layer w10: R33.1@3930,900 3967.02,937.02 U12.23@3967.02,986.71
RGMII-MDC: M1.C36 U12.1 | length 1696.7
  Top Layer w4.7: v1(3090,2105) 3092.64,2102.36 M1.C36@3145.67,2102.36
  Bottom Layer w4.7: v1(3090,2105) 3100,2115 3220,2115 3345,1990 3530,1990 4080,1440 4145,1440 4200,1385 4200,1212.07 4180.84,1192.91 U12.1@4157.48,1192.91
RGMII-MDIO: M1.C38 R39.1 U12.48 | length 1433
  Top Layer w4.7: M1.C38@3145.67,2122.05 3182.95,2122.05 v1(3210,2095)
  Bottom Layer w4.7: v1(3210,2095) 3335,1970 3520,1970 4100,1390 4100,1360.19 R39.1@4125.98,1334.2 4124.5,1332.72 U12.48@4124.5,1225.89
RGMII-NRST: M1.C30 R40.1 | length 1756.5
  Top Layer w4.7: v1(3065,2045) 3066.69,2043.31 M1.C30@3145.67,2043.31
  Bottom Layer w4.7: v1(3065,2045) 3065,2115 3085,2135 3230,2135 3355,2010 3540,2010 4090,1460 4150.67,1460 4215,1395.67 4215,1327.02 4232.02,1310 R40.1@4279.87,1310
RGMII-RXCLK: M1.C14 R32.1 | length 2106
  Top Layer w4.7: v1(3005,1885) 3144.84,1885 M1.C14@3145.67,1885.83
  Bottom Layer w4.7: v1(3005,1885) 3005,1480 3005,1477.46 3008.81,1473.65 3009.19,1473.65 3013,1469.84 3013,1464.76 3009.19,1460.95 3005,1460.95 3000.81,1460.95 2997,1457.14 2997,1452.06 3000.81,1448.25 3001.19,1448.25 3005,1444.44 3005,1440 3005,1395 3035,1365 3055,1365 3060.74,1365 3064.55,1361.19 3064.55,1360.81 3068.36,1357 3073.44,1357 3077.25,1360.81 3077.25,1365 3077.25,1369.19 3081.06,1373 3086.14,1373 3089.95,1369.19 3089.95,1365 3089.95,1360.81 3093.76,1357 3098.84,1357 3102.65,1360.81 3102.65,1365 3102.65,1369.19 3106.46,1373 3111.54,1373 3115.35,1369.19 3115.35,1365 3115.35,1360.81 3119.16,1357 3124.24,1357 3128.05,1360.81 3128.05,1365 3128.05,1369.19 3131.86,1373 3136.94,1373 3140.75,1369.19 3140.75,1365 3140.75,1360.81 3144.56,1357 3149.64,1357 3153.45,1360.81 3153.45,1365 3153.45,1369.19 3157.26,1373 3162.34,1373 3166.15,1369.19 3166.15,1365 3166.15,1360.81 3169.96,1357 3175.04,1357 3178.85,1360.81 3178.85,1365 3178.85,1369.19 3182.66,1373 3187.74,1373 3191.55,1369.19 3191.55,1365 3191.55,1360.81 3195.36,1357 3200.44,1357 3204.25,1360.81 3204.25,1365 3204.25,1369.19 3208.06,1373 3213.14,1373 3216.95,1369.19 3216.95,1365 3216.95,1360.81 3220.76,1357 3225.84,1357 3229.65,1360.81 3229.65,1365 3229.65,1369.19 3233.46,1373 3238.54,1373 3242.35,1369.19 3242.35,1365 3242.35,1360.81 3246.16,1357 3251.24,1357 3255.05,1360.81 3255.05,1365 3255.05,1369.19 3258.86,1373 3263.94,1373 3267.75,1369.19 3267.75,1365 3267.75,1360.81 3271.56,1357 3276.64,1357 3280.45,1360.81 3280.45,1365 3280.45,1369.19 3284.26,1373 3289.34,1373 3293.15,1369.19 3293.15,1365 3293.15,1360.81 3296.96,1357 3302.04,1357 3305.85,1360.81 3305.85,1365 3305.85,1369.19 3309.66,1373 3314.74,1373 3318.55,1369.19 3318.55,1365 3318.55,1360.81 3322.36,1357 3327.44,1357 3331.25,1360.81 3331.25,1365 3331.25,1369.19 3335.06,1373 3340.14,1373 3343.95,1369.19 3343.95,1365 3343.95,1360.81 3347.76,1357 3352.84,1357 3356.65,1360.81 3356.65,1365 3356.65,1369.19 3360.46,1373 3365.54,1373 3369.35,1369.19 3369.35,1365 3369.35,1360.81 3373.16,1357 3378.24,1357 3382.05,1360.81 3382.05,1365 3382.05,1369.19 3385.86,1373 3390.94,1373 3394.75,1369.19 3394.75,1365 3394.75,1360.81 3398.56,1357 3403.64,1357 3407.45,1360.81 3407.45,1365 3407.45,1369.19 3411.26,1373 3416.34,1373 3420.15,1369.19 3420.15,1365 3420.15,1360.81 3423.96,1357 3429.04,1357 3432.85,1360.81 3432.85,1365 3432.85,1369.19 3436.66,1373 3441.74,1373 3445.55,1369.19 3445.55,1365 3445.55,1360.81 3449.36,1357 3454.44,1357 3458.25,1360.81 3458.25,1365 3458.25,1369.19 3462.06,1373 3467.14,1373 3470.95,1369.19 3470.95,1365 3470.95,1360.81 3474.76,1357 3479.84,1357 3483.65,1360.81 3483.65,1361.19 3487.46,1365 3490,1365 3547.32,1365 3576.16,1336.16 3578.17,1334.15 3582.71,1334.15 3588.78,1340.21 3593.32,1340.21 3596.34,1337.19 3596.34,1332.65 3588.01,1324.31 3579.67,1315.97 3579.67,1311.43 3582.69,1308.41 3587.23,1308.41 3595.57,1316.75 3603.91,1325.08 3608.45,1325.08 3611.47,1322.06 3611.47,1317.52 3603.14,1309.18 3594.8,1300.84 3594.8,1296.3 3597.83,1293.28 3602.37,1293.28 3610.7,1301.61 3619.04,1309.95 3623.58,1309.95 3626.61,1306.92 3626.61,1302.38 3618.27,1294.05 3609.93,1285.71 3609.93,1281.17 3612.96,1278.14 3617.5,1278.14 3625.84,1286.48 3634.17,1294.82 3638.71,1294.82 3641.74,1291.79 3641.74,1287.25 3633.4,1278.92 3625.06,1270.58 3625.06,1266.04 3628.09,1263.01 3632.63,1263.01 3638.7,1269.08 3643.24,1269.08 3648.53,1263.78 3652.32,1260 3652.55,1260 3660.04,1260 3663.25,1263.21 3663.25,1271.79 3666.46,1275 3670.74,1275 3673.95,1271.79 3673.95,1260 3673.95,1248.21 3677.16,1245 3681.44,1245 3684.65,1248.21 3684.65,1256.79 3687.86,1260 3690,1260 3705,1260 3740,1225 R32.1@3759.87,1225
RGMII-RXD0: M1.C20 R46.1 R50.2 U12.31 | length 2109.3
  Top Layer w4.7: v1(2965,1945) 2965.12,1944.88 M1.C20@3145.67,1944.88
  Bottom Layer w4.7: v1(2965,1945) 2965,1355 3025,1295 3170,1295 3171.15,1293.85 3171.15,1290.81 3174.96,1287 3180.04,1287 3183.85,1290.81 3183.85,1295 3183.85,1299.19 3187.66,1303 3192.74,1303 3196.55,1299.19 3196.55,1295 3196.55,1290.81 3200.36,1287 3205.44,1287 3209.25,1290.81 3209.25,1295 3209.25,1299.19 3213.06,1303 3218.14,1303 3221.95,1299.19 3221.95,1295 3221.95,1290.81 3225.76,1287 3230.84,1287 3234.65,1290.81 3234.65,1295 3234.65,1299.19 3238.46,1303 3243.54,1303 3247.35,1299.19 3247.35,1295 3247.35,1290.81 3251.16,1287 3256.24,1287 3260.05,1290.81 3260.05,1295 3260.05,1299.19 3263.86,1303 3268.94,1303 3272.75,1299.19 3272.75,1295 3272.75,1290.81 3276.56,1287 3281.64,1287 3285.45,1290.81 3285.45,1295 3285.45,1299.19 3289.26,1303 3294.34,1303 3298.15,1299.19 3298.15,1295 3298.15,1290.81 3301.96,1287 3307.04,1287 3310.85,1290.81 3310.85,1295 3310.85,1299.19 3314.66,1303 3319.74,1303 3323.55,1299.19 3323.55,1295 3323.55,1290.81 3327.36,1287 3332.44,1287 3336.25,1290.81 3336.25,1295 3336.25,1299.19 3340.06,1303 3345.14,1303 3348.95,1299.19 3348.95,1295 3348.95,1290.81 3352.76,1287 3357.84,1287 3361.65,1290.81 3361.65,1295 3361.65,1299.19 3365.46,1303 3370.54,1303 3374.35,1299.19 3374.35,1295 3374.35,1290.81 3378.16,1287 3383.24,1287 3387.05,1290.81 3387.05,1295 3387.05,1299.19 3390.86,1303 3395.94,1303 3399.75,1299.19 3399.75,1295 3399.75,1290.81 3403.56,1287 3408.64,1287 3412.45,1290.81 3412.45,1295 3412.45,1299.19 3416.26,1303 3421.34,1303 3425.15,1299.19 3425.15,1295 3425.15,1290.81 3428.96,1287 3434.04,1287 3437.85,1290.81 3437.85,1295 3437.85,1299.19 3441.66,1303 3446.74,1303 3450.55,1299.19 3450.55,1295 3450.55,1290.81 3454.36,1287 3459.44,1287 3463.25,1290.81 3463.25,1295 3463.25,1299.19 3467.06,1303 3472.14,1303 3475.95,1299.19 3475.95,1295 3475.95,1290.81 3479.76,1287 3484.84,1287 3488.65,1290.81 3488.65,1291.19 3492.46,1295 3495,1295 3525,1295 3660,1160 3775.13,1160 R46.1@3800.13,1135 3833.55,1135 3854.38,1114.17 U12.31@3918.3,1114.17
RGMII-RXD1: M1.C18 R47.1 R51.2 U12.30 | length 2103.7
  Top Layer w4.7: v1(2945,1925) 3145.47,1925 M1.C18@3145.67,1925.2
  Bottom Layer w4.7: v1(2945,1925) 2945,1335 3020,1260 3210,1260 3218.14,1260 3221.95,1256.19 3221.95,1255.81 3225.76,1252 3230.84,1252 3234.65,1255.81 3234.65,1260 3234.65,1264.19 3238.46,1268 3243.54,1268 3247.35,1264.19 3247.35,1260 3247.35,1255.81 3251.16,1252 3256.24,1252 3260.05,1255.81 3260.05,1260 3260.05,1264.19 3263.86,1268 3268.94,1268 3272.75,1264.19 3272.75,1260 3272.75,1255.81 3276.56,1252 3281.64,1252 3285.45,1255.81 3285.45,1260 3285.45,1264.19 3289.26,1268 3294.34,1268 3298.15,1264.19 3298.15,1260 3298.15,1255.81 3301.96,1252 3307.04,1252 3310.85,1255.81 3310.85,1260 3310.85,1264.19 3314.66,1268 3319.74,1268 3323.55,1264.19 3323.55,1260 3323.55,1255.81 3327.36,1252 3332.44,1252 3336.25,1255.81 3336.25,1260 3336.25,1264.19 3340.06,1268 3345.14,1268 3348.95,1264.19 3348.95,1260 3348.95,1255.81 3352.76,1252 3357.84,1252 3361.65,1255.81 3361.65,1260 3361.65,1264.19 3365.46,1268 3370.54,1268 3374.35,1264.19 3374.35,1260 3374.35,1255.81 3378.16,1252 3383.24,1252 3387.05,1255.81 3387.05,1260 3387.05,1264.19 3390.86,1268 3395.94,1268 3399.75,1264.19 3399.75,1260 3399.75,1255.81 3403.56,1252 3408.64,1252 3412.45,1255.81 3412.45,1260 3412.45,1264.19 3416.26,1268 3421.34,1268 3425.15,1264.19 3425.15,1260 3425.15,1255.81 3428.96,1252 3434.04,1252 3437.85,1255.81 3437.85,1260 3437.85,1264.19 3441.66,1268 3446.74,1268 3450.55,1264.19 3450.55,1260 3450.55,1255.81 3454.36,1252 3459.44,1252 3463.25,1255.81 3463.25,1260 3463.25,1264.19 3467.06,1268 3472.14,1268 3475.95,1264.19 3475.95,1260 3475.95,1255.81 3479.76,1252 3484.84,1252 3488.65,1255.81 3488.65,1256.19 3492.46,1260 3495,1260 3520,1260 3670,1110 3780.13,1110 R47.1@3800.13,1090 3800,1090 R47.1@3799.87,1089.87 ; R47.1@3803.59,1090 3846.57,1090 3855,1098.43 U12.30@3918.3,1098.43
RGMII-RXD2: M1.C16 R52.2 U12.28 | length 2104.9
  Top Layer w4.7: v1(2925,1905) 3145.16,1905 M1.C16@3145.67,1905.51
  Bottom Layer w4.7: v1(2925,1905) 2925,1310 2940,1295 2965,1270 3005,1230 3325,1230 3332.44,1230 3336.25,1233.81 3336.25,1234.19 3340.06,1238 3345.14,1238 3348.95,1234.19 3348.95,1230 3348.95,1225.81 3352.76,1222 3357.84,1222 3361.65,1225.81 3361.65,1230 3361.65,1234.19 3365.46,1238 3370.54,1238 3374.35,1234.19 3374.35,1230 3374.35,1225.81 3378.16,1222 3383.24,1222 3387.05,1225.81 3387.05,1230 3387.05,1234.19 3390.86,1238 3395.94,1238 3399.75,1234.19 3399.75,1230 3399.75,1225.81 3403.56,1222 3408.64,1222 3412.45,1225.81 3412.45,1230 3412.45,1234.19 3416.26,1238 3421.34,1238 3425.15,1234.19 3425.15,1230 3425.15,1225.81 3428.96,1222 3434.04,1222 3437.85,1225.81 3437.85,1230 3437.85,1234.19 3441.66,1238 3446.74,1238 3450.55,1234.19 3450.55,1230 3450.55,1225.81 3454.36,1222 3459.44,1222 3463.25,1225.81 3463.25,1230 3463.25,1234.19 3467.06,1238 3472.14,1238 3475.95,1234.19 3475.95,1230 3475.95,1225.81 3479.76,1222 3484.84,1222 3488.65,1225.81 3488.65,1226.19 3492.46,1230 3495,1230 3505,1230 3510,1225 3595,1140 3615,1120 3615,1075 3665,1025 3780,1025 R52.2@3800,1045 3860,1045 3881.93,1066.93 U12.28@3918.3,1066.93
RGMII-RXD3: M1.C22 R53.2 U12.27 | length 2110.5
  Top Layer w4.7: v1(2905,1965) 3145.24,1965 M1.C22@3145.67,1964.57
  Bottom Layer w4.7: v1(2905,1965) 2905,1285 2990,1200 3485,1200 3590,1095 3590,1060 3670,980 3779.87,980 R53.2@3799.87,1000 3835,1000 3886.18,1051.18 U12.27@3918.3,1051.18
RGMII-RXDV: M1.C24 R55.2 U12.32 | length 2114.6
  Top Layer w4.7: v1(2985,1985) 3144.92,1985 M1.C24@3145.67,1984.25
  Bottom Layer w4.7: v1(2985,1985) 2985,1375 3030,1330 3145,1330 3145.75,1329.25 3145.75,1325.81 3149.56,1322 3154.64,1322 3158.45,1325.81 3158.45,1330 3158.45,1334.19 3162.26,1338 3167.34,1338 3171.15,1334.19 3171.15,1330 3171.15,1325.81 3174.96,1322 3180.04,1322 3183.85,1325.81 3183.85,1330 3183.85,1334.19 3187.66,1338 3192.74,1338 3196.55,1334.19 3196.55,1330 3196.55,1325.81 3200.36,1322 3205.44,1322 3209.25,1325.81 3209.25,1330 3209.25,1334.19 3213.06,1338 3218.14,1338 3221.95,1334.19 3221.95,1330 3221.95,1325.81 3225.76,1322 3230.84,1322 3234.65,1325.81 3234.65,1330 3234.65,1334.19 3238.46,1338 3243.54,1338 3247.35,1334.19 3247.35,1330 3247.35,1325.81 3251.16,1322 3256.24,1322 3260.05,1325.81 3260.05,1330 3260.05,1334.19 3263.86,1338 3268.94,1338 3272.75,1334.19 3272.75,1330 3272.75,1325.81 3276.56,1322 3281.64,1322 3285.45,1325.81 3285.45,1330 3285.45,1334.19 3289.26,1338 3294.34,1338 3298.15,1334.19 3298.15,1330 3298.15,1325.81 3301.96,1322 3307.04,1322 3310.85,1325.81 3310.85,1330 3310.85,1334.19 3314.66,1338 3319.74,1338 3323.55,1334.19 3323.55,1330 3323.55,1325.81 3327.36,1322 3332.44,1322 3336.25,1325.81 3336.25,1330 3336.25,1334.19 3340.06,1338 3345.14,1338 3348.95,1334.19 3348.95,1330 3348.95,1325.81 3352.76,1322 3357.84,1322 3361.65,1325.81 3361.65,1330 3361.65,1334.19 3365.46,1338 3370.54,1338 3374.35,1334.19 3374.35,1330 3374.35,1325.81 3378.16,1322 3383.24,1322 3387.05,1325.81 3387.05,1330 3387.05,1334.19 3390.86,1338 3395.94,1338 3399.75,1334.19 3399.75,1330 3399.75,1325.81 3403.56,1322 3408.64,1322 3412.45,1325.81 3412.45,1330 3412.45,1334.19 3416.26,1338 3421.34,1338 3425.15,1334.19 3425.15,1330 3425.15,1325.81 3428.96,1322 3434.04,1322 3437.85,1325.81 3437.85,1330 3437.85,1334.19 3441.66,1338 3446.74,1338 3450.55,1334.19 3450.55,1330 3450.55,1325.81 3454.36,1322 3459.44,1322 3463.25,1325.81 3463.25,1330 3463.25,1334.19 3467.06,1338 3472.14,1338 3475.95,1334.19 3475.95,1330 3475.95,1325.81 3479.76,1322 3484.84,1322 3488.65,1325.81 3488.65,1326.19 3492.46,1330 3495,1330 3538.22,1330 3633.22,1235 3705,1235 3740,1200 3779.87,1200 R55.2@3799.87,1180 3820,1180 3870.08,1129.92 U12.32@3918.3,1129.92
RGMII-TRX0_N: J3.3 U12.12 | length 719.6
  Bottom Layer w3.82: U12.12@4157.48,1019.69 4178.39,1019.69 4181.75,1023.06 4189.19,1023.06 4205.98,1006.27 4205.98,860.98 4165,820 4115.26,820 4083.99,788.73 4083.99,722.66 4160,646.66 4160,527.25 4168.62,518.62 4168.62,459.57 J3.3@4167.72,458.66
RGMII-TRX0_P: J3.2 U12.11 | length 723.3
  Bottom Layer w3.82: U12.11@4157.48,1035.43 4178.39,1035.43 4181.75,1032.07 4192.93,1032.07 4215,1010 4215,857.25 4168.73,810.98 4118.99,810.98 4093.01,785 4093.01,726.4 4169.02,650.39 4169.02,530.98 4175,525 4184.06,525 J3.2@4217.72,558.66
RGMII-TRX1_N: J3.5 U12.15 | length 560.9
  Bottom Layer w3.82: J3.5@4067.72,458.66 4073.62,464.57 4073.62,518.62 4062.25,530 4062.25,677.25 4050,689.5 4050,803.62 4096.38,850 4096.38,962.44 4093.01,965.8 U12.15@4093.01,986.71
RGMII-TRX1_P: J3.4 U12.14 | length 542.7
  Bottom Layer w3.82: U12.14@4108.76,986.71 4108.76,965.8 4105.39,962.44 4105.39,846.27 4059.02,799.89 4059.02,693.23 4071.27,680.98 4071.27,533.73 4080,525 4084.06,525 J3.4@4117.72,558.66
RGMII-TRX2_N: J3.8 U12.18 | length 555.4
  Bottom Layer w3.82: J3.8@3917.72,558.66 3951.38,525 3958.62,525 3964.38,530.75 3964.38,602.36 4015.98,653.96 4015.98,820.96 4049.13,854.11 4049.13,962.44 4045.76,965.8 U12.18@4045.76,986.71
RGMII-TRX2_P: J3.7 U12.17 | length 569.2
  Bottom Layer w3.82: J3.7@3967.72,458.66 3965,461.38 3965,518.62 3973.4,527.02 3973.4,598.62 4025,650.23 4025,817.23 4058.14,850.37 4058.14,962.44 4061.51,965.8 U12.17@4061.51,986.71
RGMII-TRX3_N: J3.10 U12.21 | length 600.4
  Bottom Layer w3.82: J3.10@3817.72,558.66 3850,526.38 3858.62,526.38 3865.98,533.73 3865.98,608.73 3897.01,639.76 3939.76,639.76 3980.98,680.98 3980.98,837.25 4001.89,858.15 4001.89,962.44 3998.52,965.8 U12.21@3998.52,986.71
RGMII-TRX3_P: J3.9 U12.20 | length 616
  Bottom Layer w3.82: J3.9@3867.72,458.66 3865,461.38 3865,520 3875,530 3875,605 3900.75,630.75 3943.5,630.75 3990,677.25 3990,833.52 4010.9,854.42 4010.9,962.44 4014.27,965.8 U12.20@4014.27,986.71
RGMII-TXCLK: M1.C2 U12.35 | length 1366.8
  Top Layer w4.7: v1(3090,1765) 3092.72,1767.72 M1.C2@3145.67,1767.72 M1.C2@3143.39,1770
  Bottom Layer w4.7: v1(3090,1765) 3445,1765 3526.79,1683.21 3530.16,1679.84 3533.82,1679.84 3540.06,1679.84 3544.21,1675.69 3544.21,1669.45 3542.38,1667.62 3540.55,1665.79 3540.55,1659.55 3544.71,1655.39 3550.95,1655.39 3552.78,1657.22 3554.61,1659.05 3560.85,1659.05 3565,1654.9 3565,1648.66 3563.17,1646.83 3561.34,1645 3561.34,1638.76 3565.5,1634.6 3571.73,1634.6 3573.57,1636.43 3575.4,1638.27 3581.63,1638.27 3585.79,1634.11 3585.79,1627.87 3583.96,1626.04 3582.13,1624.21 3582.13,1617.97 3586.29,1613.81 3592.52,1613.81 3594.35,1615.65 3596.19,1617.48 3602.42,1617.48 3606.58,1613.32 3606.58,1607.08 3604.75,1605.25 3602.92,1603.42 3602.92,1597.18 3607.08,1593.02 3613.31,1593.02 3615.14,1594.86 3616.98,1596.69 3623.21,1596.69 3627.37,1592.53 3627.37,1586.29 3625.54,1584.46 3623.71,1582.63 3623.71,1576.39 3627.86,1572.24 3634.1,1572.24 3635.93,1574.07 3637.76,1575.9 3644,1575.9 3648.16,1571.74 3648.16,1565.5 3646.33,1563.67 3644.5,1561.84 3644.5,1555.6 3648.65,1551.45 3654.89,1551.45 3656.72,1553.28 3658.55,1555.11 3664.79,1555.11 3668.95,1550.95 3668.95,1544.72 3667.12,1542.88 3665.28,1541.05 3665.28,1534.82 3669.44,1530.66 3675.68,1530.66 3677.51,1532.49 3679.34,1534.32 3685.58,1534.32 3689.74,1530.16 3689.74,1523.93 3687.91,1522.09 3686.07,1520.26 3686.07,1514.03 3690.23,1509.87 3696.47,1509.87 3698.3,1511.7 3700.13,1513.53 3706.37,1513.53 3710.53,1509.37 3710.53,1503.14 3710.53,1499.47 3712.5,1497.5 3860,1350 3860,1200 3882.83,1177.17 U12.35@3918.3,1177.17